# Altium PCB LabGener.PcbDoc
Units mm, origin at the board's own origin, x right, y up, seen from the top; angles counter-clockwise.
Board outline 94.69 x 76.75 mm, 2 copper layers (Top Layer, Bottom Layer); 60 components, 23 nets, 137 pads, 68 vias.
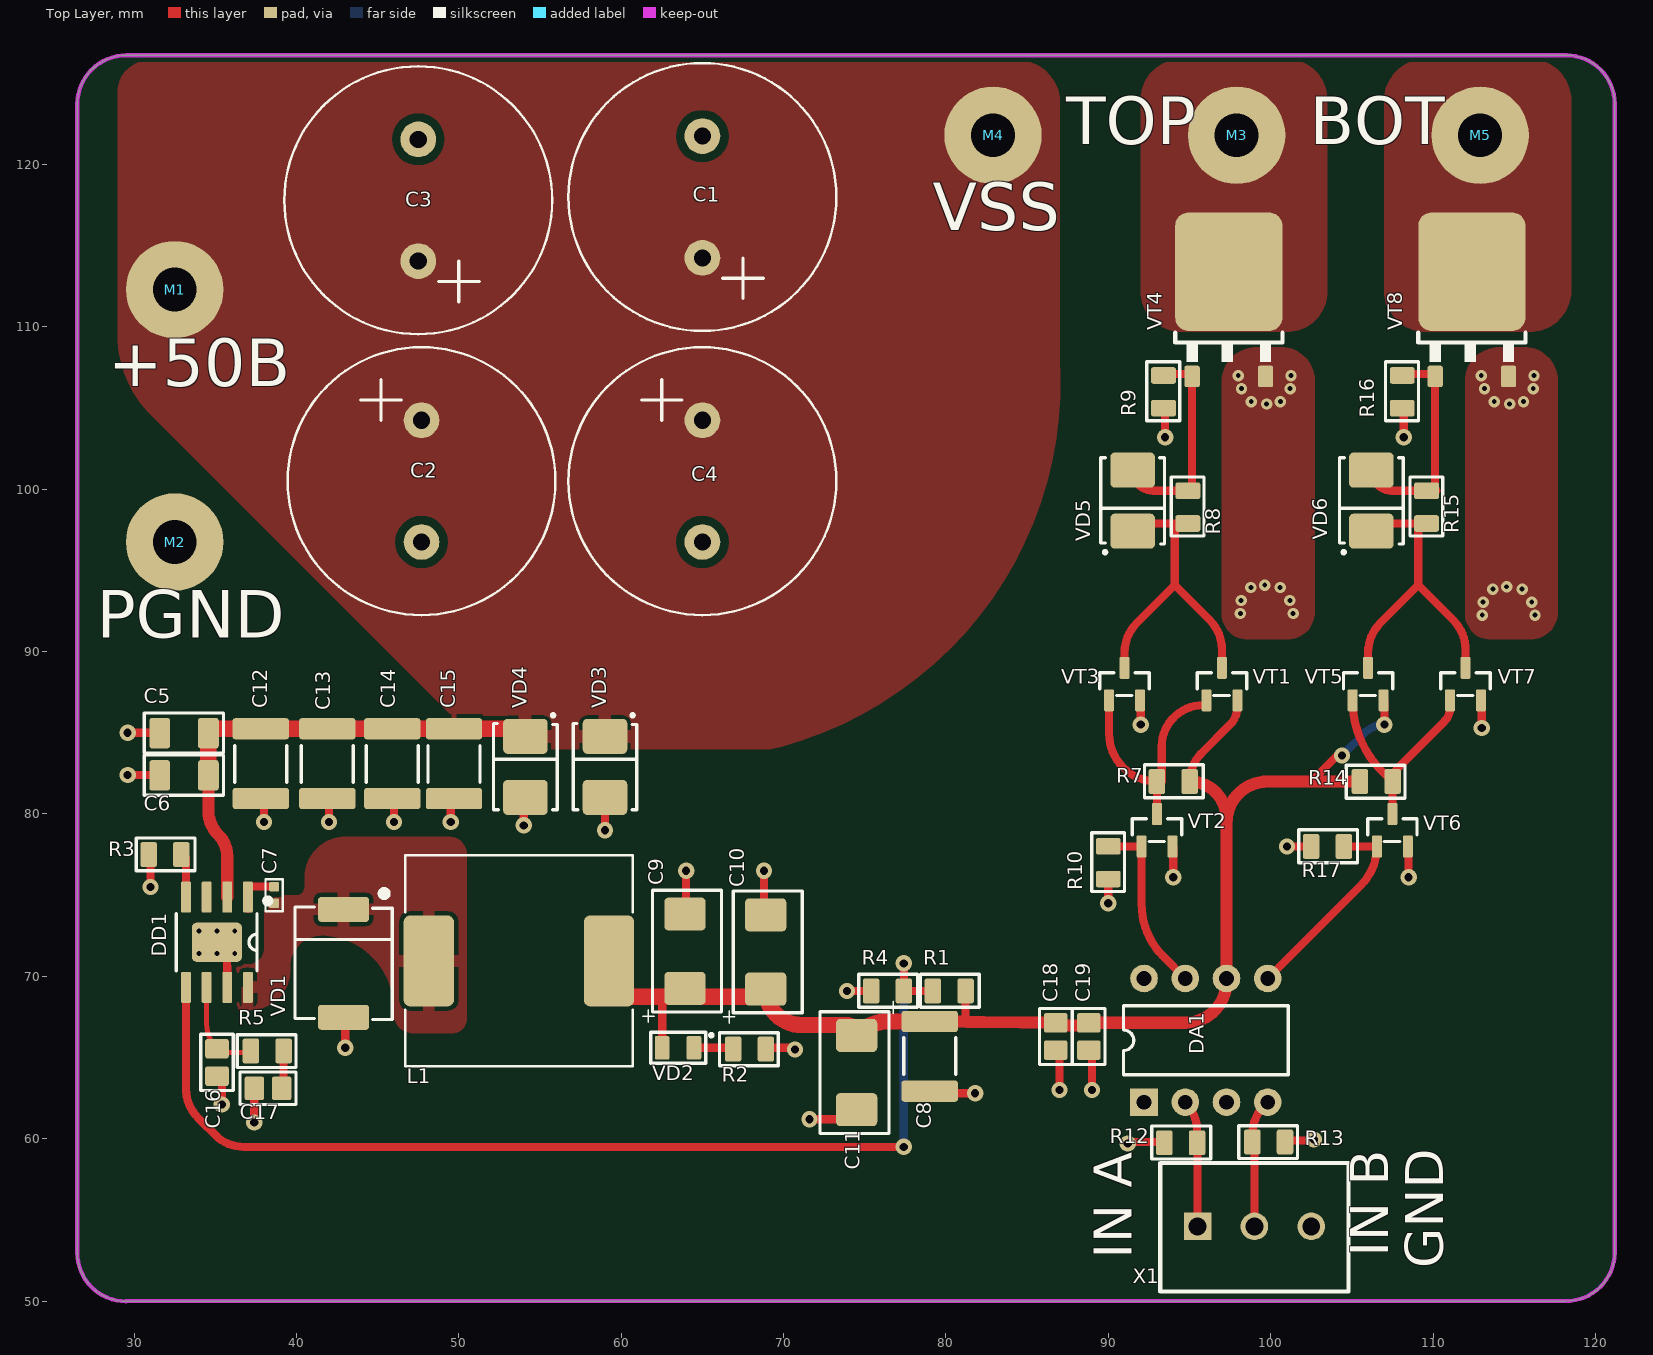
[diagram p0: Top Layer view]
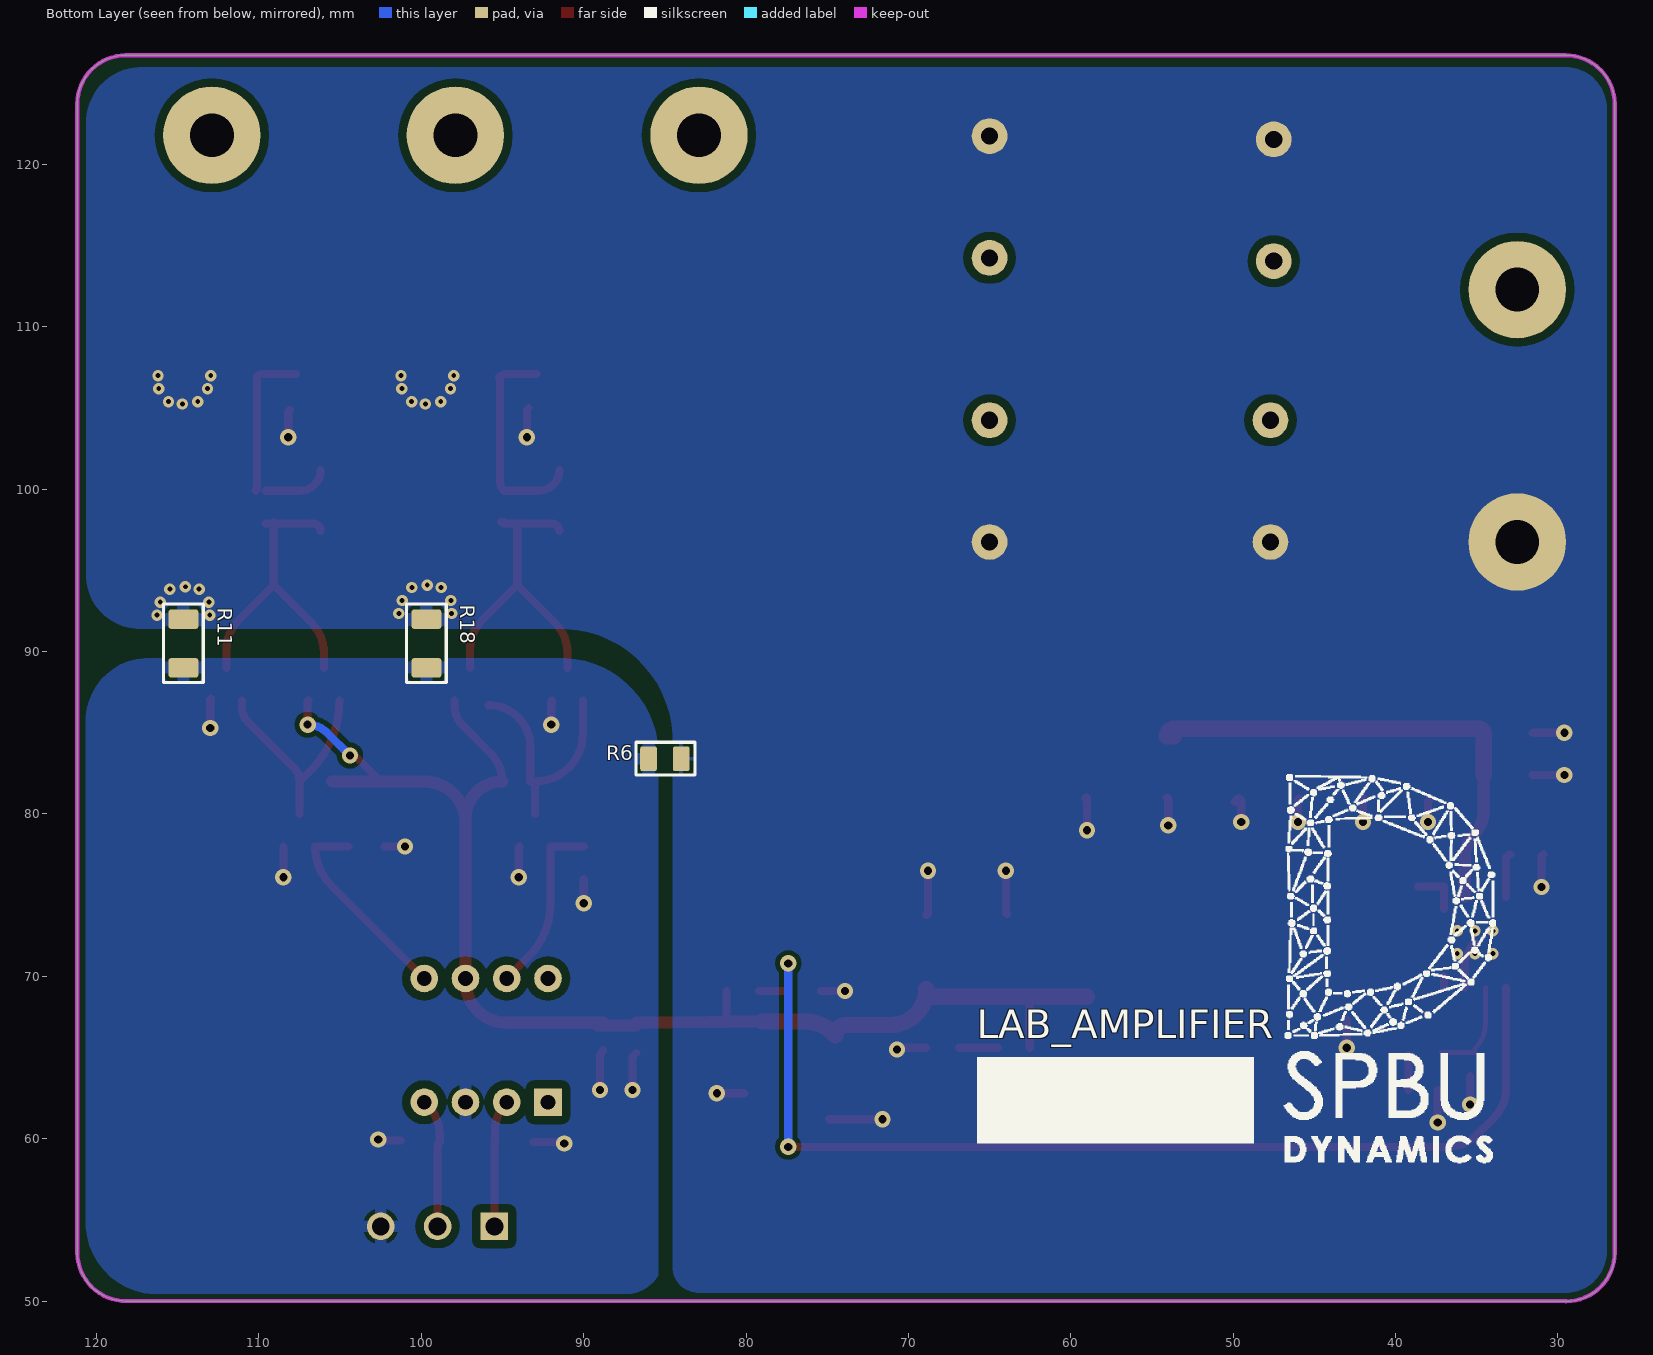
[diagram p1: Bottom Layer view, seen from below]
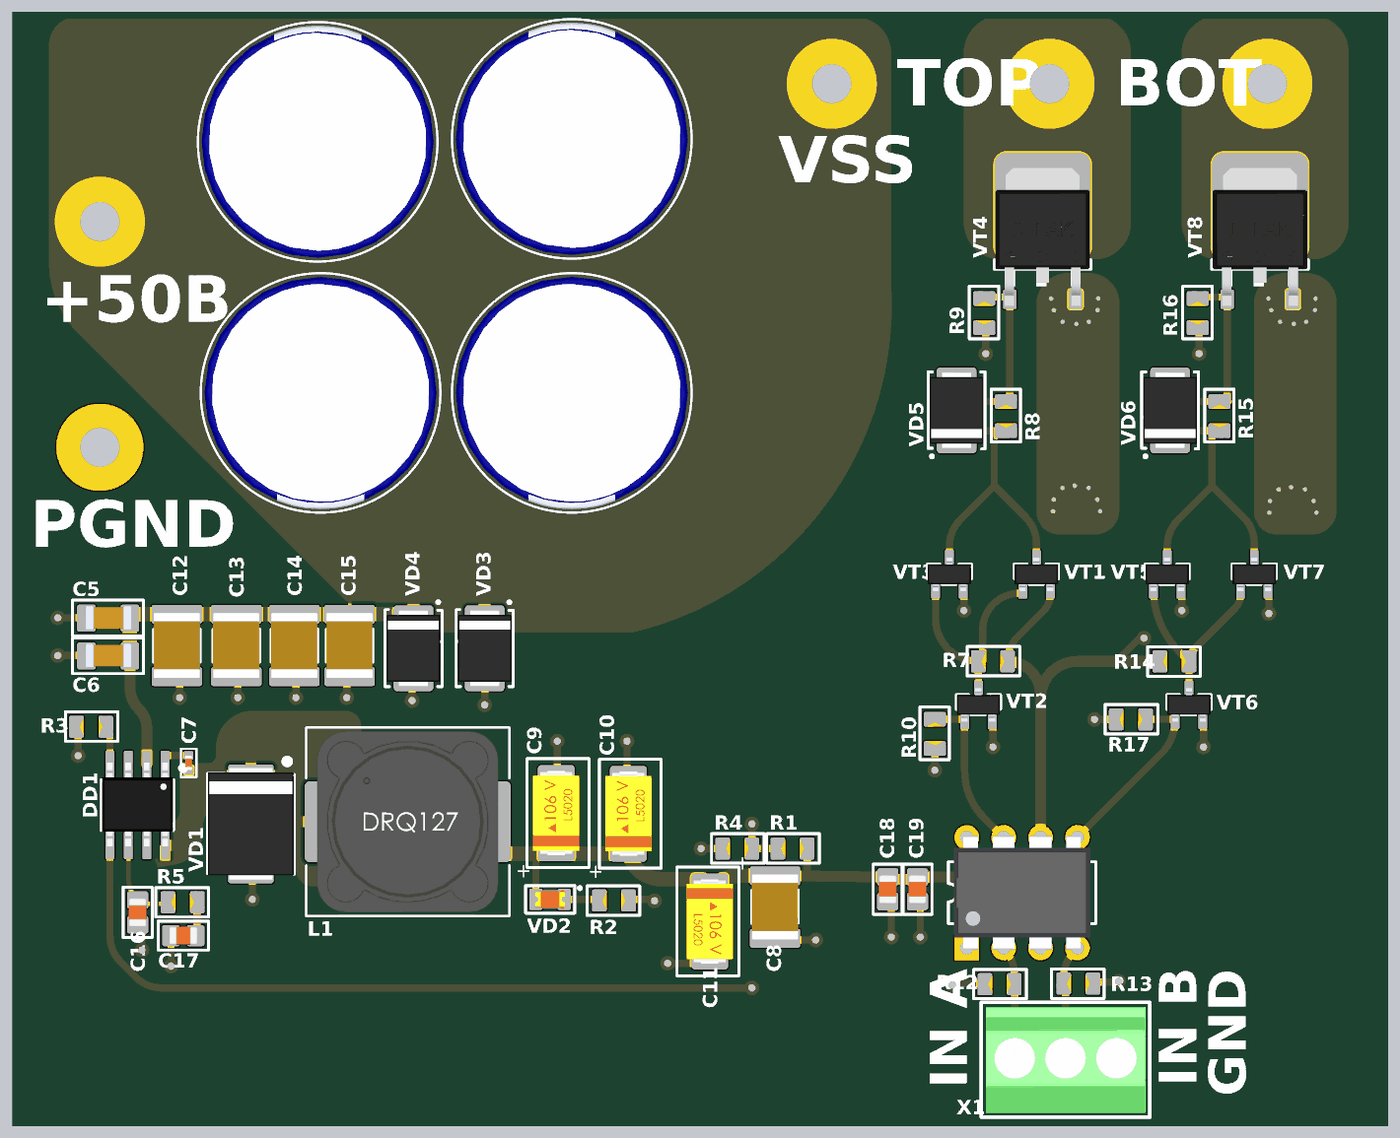
[diagram p2: 3D render of the assembled board from above, using the file's embedded part models]

## Layer stack, top to bottom
Top Solder: solder mask 0.0102, Solder Resist, Dk 3.5
Top Layer: signal copper 0.0356
Dielectric 1: dielectric 0.32, FR-4, Dk 4.8
Bottom Layer: signal copper 0.0356
Bottom Solder: solder mask 0.0102, Solder Resist, Dk 3.5

## Board outline
29.491,49.981 cw(c29.5,52.981) 26.5,52.991 26.5,52.981 26.5,123.727 cw(c29.509,123.718) 29.519,126.727 118.217,126.727 cw(c118.208,123.746) 121.189,123.737 121.189,123.746 121.189,52.991 cw(c118.189,53) 118.179,50

## Design rules (kind name [scope] priority, off if disabled: settings)
Clearance "+V - GND" [InNet('PGND') vs InNet('+50B')] p1: gap=0.5 ignorepadtopadclearanceinfootprint=FALSE
Clearance [All] p2: gap=0.3 ignorepadtopadclearanceinfootprint=FALSE except(0.5: Arc-THPad Track-THPad SMDPad-THPad THPad-THPad THPad-Via THPad-Fill THPad-Poly THPad-Region THPad-Text THPad-Hole)
Height [All] p1: minheight=0 maxheight=50 prefheight=12.7
HoleSize [All] p1: absolutevalues=TRUE maxlimit=3 minlimit=0.025 maxpercent=80.000 minpercent=20.000
MinimumSolderMaskSliver [All] p1: minsoldermaskwidth=0.05
PolygonConnect PolygonConnect_via [IsVia] p1: connectstyle=Direct reliefconductorwidth=0.75 reliefentries=4 polygonreliefangle="90 Angle" airgapwidth=0.254
PolygonConnect PolygonConnect_6 [HasFootprint('DPAK')] p2: connectstyle=Direct reliefconductorwidth=0.254 reliefentries=4 polygonreliefangle="90 Angle" airgapwidth=0.254
PolygonConnect PolygonConnect_7 [HasFootprint('R1206') vs InNet('PGND')] p3: connectstyle=Relief reliefconductorwidth=0.8 reliefentries=4 polygonreliefangle="90 Angle" airgapwidth=0.2
PolygonConnect PolygonConnect_8 [InNet('NetM3_1')] p4: connectstyle=Direct reliefconductorwidth=0.8 reliefentries=4 polygonreliefangle="90 Angle" airgapwidth=0.2
PolygonConnect PolygonConnect_11 [InNet('NetM5_1')] p5: connectstyle=Direct reliefconductorwidth=0.8 reliefentries=4 polygonreliefangle="90 Angle" airgapwidth=0.2
PolygonConnect PolygonConnect_10 [HasFootprint('K50-35(16X35)_V')] p6: connectstyle=Direct reliefconductorwidth=0.8 reliefentries=4 polygonreliefangle="90 Angle" airgapwidth=0.2
PolygonConnect PolygonConnect_9 [All vs InNet('PGND')] p7: connectstyle=Relief reliefconductorwidth=0.8 reliefentries=4 polygonreliefangle="90 Angle" airgapwidth=0.2
PolygonConnect PolygonConnect_5 [InNet('+50B') vs HasFootprint('SMB')] p8: connectstyle=Relief reliefconductorwidth=0.8 reliefentries=4 polygonreliefangle="90 Angle" airgapwidth=0.2
PolygonConnect PolygonConnect_4 [All vs IsNamedPolygon('+50B_L01_P020')] p9: thpad.connectstyle=Direct thpad.reliefconductorwidth=0.254 thpad.reliefentries=4 thpad.polygonreliefangle="90 Angle" thpad.airgapwidth=0.254 smdpad.connectstyle=Relief smdpad.reliefconductorwidth=0.254 smdpad.reliefentries=4 smdpad.polygonreliefangle="90 Angle" smdpad.airgapwidth=0.254 via.connectstyle=Relief via.reliefconductorwidth=0.254 via.reliefentries=4 via.polygonreliefangle="90 Angle" via.airgapwidth=0.254
PolygonConnect PolygonConnect_3 [All vs IsNamedPolygon('PGND_L02_P030')] p10: thpad.connectstyle=Direct thpad.reliefconductorwidth=0.254 thpad.reliefentries=4 thpad.polygonreliefangle="90 Angle" thpad.airgapwidth=0.254 smdpad.connectstyle=Relief smdpad.reliefconductorwidth=0.254 smdpad.reliefentries=4 smdpad.polygonreliefangle="90 Angle" smdpad.airgapwidth=0.254 via.connectstyle=Relief via.reliefconductorwidth=0.254 via.reliefentries=4 via.polygonreliefangle="90 Angle" via.airgapwidth=0.254
PolygonConnect PolygonConnect_2 [All vs IsNamedPolygon('NETM1_1_L01_P024') Or  IsNamedPolygon('NETM3_1_L01_P026')] p11: thpad.connectstyle=Direct thpad.reliefconductorwidth=0.254 thpad.reliefentries=4 thpad.polygonreliefangle="90 Angle" thpad.airgapwidth=0.254 smdpad.connectstyle=Direct smdpad.reliefconductorwidth=0.254 smdpad.reliefentries=4 smdpad.polygonreliefangle="90 Angle" smdpad.airgapwidth=0.254 via.connectstyle=Relief via.reliefconductorwidth=0.254 via.reliefentries=4 via.polygonreliefangle="90 Angle" via.airgapwidth=0.254
PolygonConnect PolygonConnect_1 [All vs IsNamedPolygon('NETM3_1_L01_P026')] p12: thpad.connectstyle=Direct thpad.reliefconductorwidth=0.254 thpad.reliefentries=4 thpad.polygonreliefangle="90 Angle" thpad.airgapwidth=0.254 smdpad.connectstyle=Direct smdpad.reliefconductorwidth=0.254 smdpad.reliefentries=4 smdpad.polygonreliefangle="90 Angle" smdpad.airgapwidth=0.254 via.connectstyle=Relief via.reliefconductorwidth=0.254 via.reliefentries=4 via.polygonreliefangle="90 Angle" via.airgapwidth=0.254
PolygonConnect [All] p13: connectstyle=Relief reliefconductorwidth=0.75 reliefentries=4 polygonreliefangle="90 Angle" airgapwidth=0.254
PolygonConnect PolygonConnect_ [All] p14: connectstyle=Direct reliefconductorwidth=0.75 reliefentries=4 polygonreliefangle="90 Angle" airgapwidth=0.254
RoutingVias [All] p1: holewidth=1 width=1 viastyle="Through Hole" minholewidth=0.3 minwidth=0.7 maxholewidth=1 maxwidth=3
SilkToSilkClearance [All] p1: silktosilkclearance=0
SilkToSolderMaskClearance [IsPad] p1: minsilkscreentomaskgap=0 clearancetoexposedcopper=TRUE
SolderMaskExpansion [All] p1: expansion=0.102
Width [All] p1: maxlimit=2 minlimit=0.1 preferedwidth=0.2 minimp=50.000000 maximp=50.000000 favimp=50.000000
25 further rules are at their usual default settings.

## Components (designator, comment, footprint, x,y, rotation, side; value= is the part's Value field where it differs from the comment)
C1 "Capacitor_pol" K50-35(16X35)_V 65,118 r180 top value=220мк
C2 "Capacitor_pol" K50-35(16X35)_V 47.7,100.5 r0 top value=220мк
C3 "Capacitor_pol" K50-35(16X35)_V 47.5,117.8 r180 top value=220мк
C4 "Capacitor_pol" K50-35(16X35)_V 65,100.5 r0 top value=220мк
C5 "0,1мк" C1206 33.1,85 r0 top
C6 "0,1мк" C1206 33.1,82.4 r0 top
C7 "0,1мк" C0402 38.6,75 r90 top
C8 "0,15мк" C1812 79,65.075 r270 top
C9 "Capacitor_pol" "TANTAL CASE C" 63.925,71.55 r90 top value=47мк
C10 "Capacitor_pol" "TANTAL CASE C" 68.9,71.5 r90 top value=47мк
C11 "Capacitor_pol" "TANTAL CASE C" 74.5,64.075 r270 top value=47мк
C12 "2,2мк" C1812 37.8,83.1 r90 top
C13 "2,2мк" C1812 41.9,83.1 r90 top
C14 "2,2мк" C1812 45.9,83.1 r90 top
C15 "2,2мк" C1812 49.7,83.1 r90 top
C16 "47" C0805 35.1,64.7 r90 top
C17 "4700" C0805 38.245,63.105 r0 top
C18 "1мк" C0805 86.76,66.295 r90 top
C19 "0,1мк" C0805 88.8,66.295 r90 top
DA1 "TC4424" DIP8 96,66 r90 top
DD1 "TPS54560" "SO Powerpad8" 35.1,72.1 r180 top
L1 "Inductor" IND_12.5x12.5 53.7,70.95 r0 top value=22мкГн
M1 "SCREW" SCREW2.5 32.5,112.3 r0 top
M2 "SCREW" SCREW2.5 32.5,96.75 r0 top
M3 "SCREW" SCREW2.5 97.9,121.8 r0 top
M4 "SCREW" SCREW2.5 82.9,121.8 r270 top
M5 "SCREW" SCREW2.5 112.9,121.8 r0 top
R1 "Resistor_0,125Вт" R0805 80.2,69.1 r0 top value=53,6к
R2 "Resistor_0,125Вт" R0805 67.9,65.524 r180 top value=510
R3 "Resistor_0,125Вт" R0805 31.9,77.5 r0 top value=243к
R4 "Resistor_0,125Вт" R0805 76.4,69.1 r0 top value=10,2к
R5 "Resistor_0,125Вт" R0805 38.2,65.405 r180 top value=16,9к
R6 "Resistor_0,125Вт" R0805 85,83.4 r180 bottom value=0
R7 "Resistor_0,125Вт" R0805 94,82 r0 top value=5,1
R8 "Resistor_0,125Вт" R0805 94.9,98.9 r90 top value=5,1
R9 "Resistor_0,125Вт" R0805 93.4,106 r90 top value=270
R10 "Resistor_0,125Вт" R0805 90,77 r90 top value=10к
R11 "Resistor_0,25Вт" R1206 114.653,90.5 r90 bottom value=1
R12 "Resistor_0,125Вт" R0805 94.457,59.75 r0 top value=10к
R13 "Resistor_0,125Вт" R0805 99.876,59.8 r180 top value=10к
R14 "Resistor_0,125Вт" R0805 106.5,82 r180 top value=5,1
R15 "Resistor_0,125Вт" R0805 109.6,98.9 r90 top value=5,1
R16 "Resistor_0,125Вт" R0805 108.1,106 r90 top value=270
R17 "Resistor_0,125Вт" R0805 103.5,78 r0 top value=10к
R18 "Resistor_0,25Вт" R1206 99.684,90.5 r90 bottom value=1
VD1 "DiodeSchottky" SMC 42.9,70.8 r270 top
VD2 "LED" L_0805 63.5,65.6 r180 top
VD3 "DiodeZener" SMB 59,82.9 r270 top
VD4 "DiodeZener" SMB 54.1,82.9 r270 top
VD5 "Diode" SMB 91.5,99.3 r90 top
VD6 "Diode" SMB 106.2,99.3 r90 top
VT1 "P-MOSFET" SOT23-3 97,88 r90 top
VT2 "N-MOSFET" SOT23-3 93,79 r90 top
VT3 "N-MOSFET" SOT23-3 91,88 r90 top
VT4 "N-MOSFET" DPAK 97.423,113.248 r0 top
VT5 "P-MOSFET" SOT23-3 106,88 r90 top
VT6 "N-MOSFET" SOT23-3 107.5,79 r90 top
VT7 "N-MOSFET" SOT23-3 112,88 r90 top
VT8 "N-MOSFET" DPAK 112.392,113.248 r0 top
X1 "Клеммник 3,5мм" TERMINAL-3WAY-3.5MM 99,54.6 r0 top

## Footprints (in the part's own frame and the unit in brackets; to place one, negate y for a bottom-side part, rotate by r counter-clockwise, add the part's x,y. Pads: shape width x height; smd on the part's side, far side on the other; paste and mask are expansions set on the pad)
C0402 [mm]
  rrect25% 0.59x0.6 smd: 1(-0.5,-0.02) 2(0.525,-0.02)
  silkscreen extent -0.98,-0.55 0.98,0.51, body extent -0.49,-0.25 0.51,0.25, height 0.48
C0805 [mm]
  rrect25% 1.21x1.46 smd paste-5: 1(-0.845,0) 2(0.845,0)
  silkscreen extent -1.73,-1 1.73,1, body extent -1,-0.62 1,0.63, height 0.78
C1206 [mm]
  rrect25% 1.28x1.87 smd: 1(-1.528,-0.024) 2(1.472,-0.024)
  silkscreen extent -2.48,-1.25 2.4,1.22, body extent -1.6,-0.85 1.6,0.85, height 1.75
C1812 [mm]
  rrect25% 1.3x3.47 smd: 1(-2.15,0) 2(2.15,0)
  silkscreen extent -1.15,-1.6 1.13,1.6, body extent -2.25,-1.6 2.25,1.6, height 1.3
DIP8 [mm]
  rect 1.7x1.7 hole 0.9: 1(-3.75,3.8)
  round 1.7 hole 0.9: 2(-3.75,1.26) 3(-3.75,-1.28) 4(-3.75,-3.82) 5(3.87,-3.82) 6(3.87,-1.28) 7(3.87,1.26) 8(3.87,3.8)
  silkscreen extent -2.06,-5.09 2.18,5.07, body extent -3.87,-4.71 4,4.69, height 4.36
DPAK [mil]
  rrect25% 37x52 smd: 1(-89,-248) 3(89,-248)
  rrect25% 260x288 smd: 2(0,6)
  silkscreen extent -130,-213 130,-142, body extent -193,-266 128,108, height 91
IND_12.5x12.5 [mm]
  rrect25% 3.1x5.6 smd: 1(-5.55,0) 2(5.55,0)
  silkscreen extent -7,-6.5 7,6.5, body extent -6.25,-6.25 6.25,6.25, height 8
K50-35(16X35)_V [mm]
  round 2.2 hole 1.05 mask+0.102: 1(0,3.75)
  round 2.2 hole 1.05: 2(0,-3.75)
  silkscreen extent -8.25,-8.25 8.25,8.25, body extent -8,-8.01 8,8, height 35.61
L_0805 [mm] "SMD LED LAMP"
  rrect25% 0.91x1.46 smd: 1(-0.975,0) 2(0.975,0)
  silkscreen extent -2.15,-0.95 1.67,0.95, body extent -1.01,-0.62 1.01,0.63, height 1.1
R0805 [mm] "Chip Resistor, 2-Leads, Body 2,10x1,30mm, IPC Medium Density"
  rrect25% 1.02x1.53 smd paste-5: 1(-1.007,0) 2(1.007,0)
  silkscreen extent -1.77,-1 1.85,1.02, body extent -1.1,-0.7 1.1,0.7, height 0.55
R1206 [mm]
  rrect25% 1.2x1.83 smd: 1(-1.5,0) 2(1.5,0)
  silkscreen extent -2.4,-1.23 2.42,1.23, body extent -1.6,-0.8 1.6,0.8, height 0.55
SCREW2.5 [mm]
  round 6 hole 2.7: 1(0,0)
SMB [mm]
  rrect25% 2.159x2.743 smd: 1(-1.88,0) 2(1.88,0)
  silkscreen extent -3.27,-1.96 2.64,1.96, body extent -2.65,-1.85 2.65,1.85, height 2.24
SMC [mm]
  rrect25% 1.54x3.14 smd: 1(-3.325,0) 2(3.325,0)
  silkscreen extent -4.5,-3 3.47,3, body extent -3.9,-2.95 3.9,2.95, height 2.44
"SO Powerpad8" [mm]
  rrect25% 0.61x1.91 smd: 1(-1.905,-2.78) 2(-0.635,-2.78) 3(0.635,-2.78) 4(1.905,-2.78) 5(1.905,2.78) 6(0.635,2.78) 7(-0.635,2.78) 8(-1.905,2.78)
  rrect25% 3.1x2.41 smd: 9(0,0)
  silkscreen extent -3.34,-2.76 2.5,1.75, body extent -2.45,-2.92 2.45,2.85, height 1.45
SOT23-3 [mm]
  rrect25% 1.35x0.61 smd: 1(-1,0.95) 2(1,0) 3(-1,-0.95)
  silkscreen extent -0.7,-1.52 0.7,1.52, body extent -1.15,-1.5 1.15,1.5, height 1.1
"TANTAL CASE C" [mil]
  rrect25% 80x100 smd: 1(-90,0) 2(90,0)
  silkscreen extent -172,-89 148,102, body extent -114,-63 114,63, height 102
TERMINAL-3WAY-3.5MM [mm]
  rect 1.7x1.7 hole 1.1: 1(-3.5,0)
  round 1.7 hole 1.1: 2(0,0) 3(3.5,0)
  silkscreen extent -5.8,-4 5.8,3.9, body extent -5.5,-3.7 5.5,3.6, height 8.5

## Part data
C1 C2 C3 C4: library part cap278, "Конденсатор полярный", Manufacture=Jamicon, Part Name=Electrolit, Part Number=TKR221M2CK35, Voltage=160B, ESR=95мОм, Iac max=0,5А, Iac rated=0,9А, id=cap278, Zmax=38мОм
C5 C6: library part cap179, "Конденсатор", Manufacture=Murata, Part Name=Ceramic, Part Number=GRM31CR72E104K, Voltage=250В, id=cap179, TKE=X7R
C7: library part cap277, "Конденсатор", Manufacture=Murata, Part Name=Ceramic, Part Number=GRM155R71H104KE14D, Voltage=50В, id=cap277, tga=0,10%, TKE=X7R
C8: library part cap285, "Конденсатор", Manufacture=TDK, Part Name=Ceramic, Part Number=C4532C0G1H154J250KA, Voltage=50В, id=cap285, TKE=NP0
C9 C10 C11: library part cap306, "Конденсатор полярный", Manufacture=Китай, Part Name=Tantal, Part Number=TECAP47/16VC10, Voltage=16В, id=cap306
C12 C13 C14 C15: library part cap293, "Конденсатор", Manufacture=TDK, Part Name=MLCC, Part Number=C4532X7R2A225M, Voltage=100В, id=cap293, tga=0,10%, TKE=X7R
C16: library part cap305, "Конденсатор", Manufacture=Murata, Part Name=MLCC, Part Number=GRM2165C1H470JD01D, Voltage=50В, id=cap305, tga=0,10%, TKE=NP0
C17: library part cap169, "Конденсатор", Manufacture=Murata, Part Name=Ceramic, Part Number=GRM216R71H472K, Voltage=50В, id=cap169, TKE=X7R
C18: library part cap151, "Конденсатор", Manufacture=Murata, Part Name=Ceramic, Part Number=GRM21BR71H105K, Voltage=50B, id=cap151, TKE=X7R
C19: library part cap160, "Конденсатор", Manufacture=Murata, Part Name=Ceramic, Part Number=GRM21BR71H104KA01L, Voltage=50В, id=cap160, TKE=X7R
DA1: library part driver29, "3A Dual High-Speed Power MOSFET Drivers", Manufacture=Microchip, Maximum output current=3A, Maximum Power Dissipation=730mW, Max Operating Supply Voltage=18B, Max Supply Current=2,5mA, Min Operating Supply Voltage=4,5B, Part Number=TC4424CPA, id=driver29, Logic High=2,4В, Logic Low=0,8B-1,6B, Part Name="3A Dual High-Speed Power MOSFET Drivers", “A” OUTPUT=Noninverting, “B” OUTPUT=Noninverting
DD1: library part pwr127, "5-A, Wide Input Range, Step-Down Converter", Current=5A, Frequency="100 kHz-25 MHz", Input Voltage=4,5-60В, Manufacturer="Texas Instruments", Output Voltage=0,8B-58,8B, Part Name="Step Down DC-DC Converter with Eco-mode", Part Number=TPS54560BQDDAQ1, id=pwr127, Type=Impulse
L1: library part ind79, "EMI Suppression Filter", Manufacture=Epcos, Part Name="SMD Power Inductors", Part Number=B82477G4223M000, Rated Current=3,6A, Resistance=0,038Ohm, Saturation Current=4,25A, id=ind79
M1 M2 M3 M4 M5: library part connect88, Part Name="Винт М2.5 с заземлением", id=connect88
R1: library part res1234, "Резистор", Manufacture=Yageo, Part Name=Resistor, Part Number=RC0805FR-0753K6L, Power=0,125Вт, Accuracy=0,01, id=res1234
R2: library part res68, "Резистор", Manufacture=Yageo, Part Name=Resistor, Part Number=RC0805FR-07510RL, Power=0,125Вт, Accuracy=0,01, id=res68
R3: library part res1189, "Резистор", Manufacture=Yageo, Part Name=Resistor, Part Number=RC0805FR-07243KL, Power=0,125Вт, Accuracy=0,01, id=res1189
R4: library part res1230, "Резистор", Manufacture=Yageo, Part Name=Resistor, Part Number=RC0805FR-0710K2L, Power=0,125Вт, Accuracy=0,01, id=res1230
R5: library part res1186, "Резистор", Manufacture=Yageo, Part Name=Resistor, Part Number=RC0805FR-0716K9L, Power=0,125Вт, Accuracy=0,01, id=res1186
R6: library part res0, "Резистор", Manufacture=Yageo, Part Name=Resistor, Part Number=RC0805FR-070RL, Power=0,125Вт, Accuracy=0,01, id=res0
R7 R8 R14 R15: library part res18, "Резистор", Manufacture=Yageo, Part Name=Resistor, Part Number=RC0805FR-075R1L, Power=0,125Вт, Accuracy=0,01, id=res18
R9 R16: library part res60, "Резистор", Manufacture=Yageo, Part Name=Resistor, Part Number=RC0805FR-07270RL, Power=0,125Вт, Accuracy=0,01, id=res60
R10 R12 R13 R17: library part res101, "Резистор", Manufacture=Yageo, Part Name=Resistor, Part Number=RC0805FR-0710KL, Power=0,125Вт, Accuracy=0,01, id=res101
R11 R18: library part res584, "Резистор", Manufacture=Yageo, Part Name=Resistor, Part Number=RC1206FR-071RL, Power=0,25Вт, Accuracy=0,01, id=res584
VD1: library part diode32, "Диод Шоттки", Breakdown Voltage=60B, Capacitance=300pF, Forward Current=5A, Forward Voltage=0,7B, Leakage current=20mA, Manufacture="Diodes Incorporated", Part Name="SCHOTTKY BARRIER RECTIFIER", Part Number=B560C, Temp MAX=+150, Temp MIN=-55, id=diode32, Max Reverse Voltage=60B, Number of Channels=1
VD2: library part diode5, "Светодиод", Part Number=KP-2012EC, id=diode5, Part Name=LED
VD3 VD4: library part TPSMB56A, "Cтабилитрон (лавинный выпрямительный диод) односторонний", Breakdown Voltage=58,8B, Clamping voltage=77B, Leakage current=8uA, Manufacture=Littelfuse, Part Name="TVS diode Unidirectional", Peak Pulse Power=600W, Stand-off Voltage=56B, id=tvs285, Number of diodes=1, Part Number=TPSMB56A
VD5 VD6: library part diode33, "Диод", Breakdown Voltage=400B, Forward Current=1A, Forward Voltage=1,25B, Manufacture="ON Semiconductor", Part Name="Ultrafast Power Rectifiers", Part Number=MURS140T3G, id=diode33, Max Reverse Voltage=400B, Reverse Recovery time=50ns
VT1 VT5: library part mosfert27, "N-MOSFET", Continuous drain current=(-4)A, Gate-to-source voltage=(+-)12B, Manufacturer=Alpha&Omega, Part Number=AO3401A, Power dissipation=1,4W, Pulsed drain current=(-27)A, id=mosfert27, Rds=0,06Ohm, Structure=p-channel, Total gate charge=14nC, V drain-source max=(-30B)
VT2 VT3 VT6 VT7: library part mosfert26, Continuous drain current=5,7A, Gate-to-source voltage=(+-)12B, Manufacturer=Alpha&Omega, Part Number=AO3400A, Power dissipation=1,4W, Pulsed drain current=30A, id=mosfert26, Rds=0,032Ohm, Structure=n-channel, Total gate charge=7nC, V drain-source max=30B
VT4 VT8: library part mosfert20, Continuous drain current=33A, Gate-to-source voltage=(+-)20B, Manufacturer="International Rectifier", Part Number=IRFR4615PbF, Power dissipation=144W, Pulsed drain current=140A, id=mosfert20, Rds=0,042Ohm, Structure=n-channel, Total gate charge=26nC, V drain-source max=150B
X1: library part connect35, "Разъем - 3 конт. клеммник", Part Name="TERMINAL BLOCK 3 way", Contact_1="IN A", Contact_2="IN B", Contact_3=GND, Etch=3.5mm, id=connect35

## Via types
v1: diameter 1, hole 0.5, Top Layer to Bottom Layer, tented both sides, 34 vias
v2: diameter 0.7, hole 0.3, Top Layer to Bottom Layer, tented both sides, 34 vias

## Nets (pads, with @x,y where several pads share a name; then routed paths per layer and width w, separated by ;. In a path a pad name is that pad's centre, name@x,y a point inside that pad or via, vN(x,y) a via of type N, cw(c..) or ccw(c..) an arc to the next point about the centre after c; other vN are vias at no path point)
+5B: C8.1 C9.1 C10.1 C11.1 C18.2 C19.2 DA1.6 L1.2 R1.2 R7.2 R14.2 VD2.2 VT1.3 VT5.3 | length 84.2
  Top Layer w0.5: 62.5,68.75 cw(c62.5,68.725) 62.525,68.725 VD2.2 ; R1.2 81.207,67.43 ccw(c81.524,67.43) 81.3,67.206 ; R7.2@95.015,82.007 cw(c97.447,82.007) 95.727,83.727 97.5,85.5 ccw(c96.414,86.586) 97.95,86.586 VT1.3 ; 102.5,82 104.1,83.6 v1(104.4,83.6) ; VT5.3 cw(c106.95,86.958) 106.993,86.958 107,86.958 v1(107,85.5)
  Top Layer w0.75: C8.1@79,67.234 81.3,67.206 82.295,67.194 C18.2 ; C18.2@86.76,66.98 C19.2@89.14,66.98 ; C19.2 94.74,67.14 ccw(c94.74,69.68) 97.28,69.68 DA1.6 97.28,79.46 ; R7.2@95.015,82.007 cw(c95,79.728) 97.28,79.728 97.28,79.46 ; R14.2 102.5,82 99.82,82 ccw(c99.82,79.46) 97.28,79.46
  Top Layer w1: L1.2@59,68.75 62.5,68.75 68.9,68.75 C10.1 ccw(c71.114,69.214) 71.114,67 73.861,67 cw(c73.861,66.361) C11.1 74.62,66.481 cw(c76.416,64.685) 76.416,67.225 C8.1
  Bottom Layer w0.5: v1(104.4,83.6) 105.805,85.005 cw(c107,83.81) v1(107,85.5)
+50B: C1.1 C2.1 C3.1 C4.1 C5.2 C6.2 C12.2 C13.2 C14.2 C15.2 DD1.2 M1.1 M4.1 VD3.1 VD4.1 | length 30.8
  Top Layer w0.75: C6.2 34.572,80.216 ccw(c36.716,80.216) 35.2,78.7 cw(c33.908,77.408) 35.735,77.408 DD1.2
  Top Layer w1: C6.2 C5.2 cw(c34.846,84.976) 34.846,85.25 C12.2 C13.2 C14.2 C15.2 53.63,85.25 cw(c53.63,84.78) VD4.1 VD4.1@53.64,84.78
DGND: C18.1 C19.1 DA1.3 R6.1 R10.1 R11.1 R12.1 R13.1 R17.1 R18.1 VT2.3 VT3.3 VT6.3 VT7.3 X1.3 | length 18
  Top Layer w0.5: C18.1@86.76,65.29 87,65.05 v1(87,63) ; C19.1 cw(c88.317,64.967) 89,64.967 v1(89,63) ; v1(90,74.5) R10.1 ; v1@91.434,59.8 R12.1@93.1,59.8 ; VT3.3 cw(c91.829,86.879) 92,86.879 v1(92,85.5) ; VT2.3 cw(c93.829,77.879) 94,77.879 v1(94,76.1) v1@94,76 ; v1(101,78) R17.1@102.268,78 ; R13.1@101.25,59.9 v1@102.7,59.9 ; v1(108.5,76.1) VT6.3@108.5,77.979 ; VT7.3@112.95,87.1 113,87.05 v1(113,85.3)
  other v1: 91.2,59.7 102.65,59.95
NetC7_1: C7.1 DD1.8 L1.1 VD1.1 | length 0.7
  Top Layer w0.5: DD1.8 DD1.8@37.005,70.005
NetC7_2: C7.2 DD1.1 | length 3
  Top Layer w0.5: DD1.1@37.005,74.14 DD1.1 37.005,75.525 C7.2
NetC16_2: C16.2 DD1.6 R5.2 | length 6
  Top Layer w0.3: DD1.6 34.465,67.078 ccw(c36.633,67.078) C16.2 ; C16.2@35.1,65.3 35.105,65.305 R5.2@37.193,65.305
NetC17_2: C17.2 R5.1 | length 2.1
  Top Layer w0.5: C17.2@39.19,63.005 R5.1@39.19,65.15
NetDA1_2: DA1.2 R12.2 X1.1 | length 7.9
  Top Layer w0.5: DA1.2@94.715,62.19 cw(c94.8,62.19) DA1.2 cw(c92.99,60.5) 95.465,60.5 R12.2 cw(c95.38,59.665) 95.5,59.665 X1.1
NetDA1_4: DA1.4 R13.2 X1.2 | length 8
  Top Layer w0.5: X1.2 99,59.484 ccw(c98.553,59.484) R13.2 98.869,60.247 cw(c101.409,60.247) 99.613,62.043 DA1.4
NetDA1_5: DA1.5 R17.2 VT6.1 | length 13
  Top Layer w0.5: DA1.5@100.018,69.87 DA1.5 105.56,75.61 ccw(c103.17,78) VT6.1 ; R17.2@104.5,78.007 VT6.1@106.55,78.007
NetDA1_7: DA1.7 R10.2 VT2.1 | length 11.1
  Top Layer w0.5: R10.2 92.05,78.007 VT2.1 92.05,74.455 ccw(c96.625,74.455) 93.39,71.22 DA1.7
NetDD1_4: DD1.4 R3.2 | length 2.8
  Top Layer w0.5: R3.2 cw(c32.908,77.213) 33.195,77.213 DD1.4
NetDD1_5: DD1.5 R1.1 R4.2 | length 67.1
  Top Layer w0.5: DD1.5 33.195,63.077 ccw(c35.735,63.077) 33.939,61.281 35.154,60.066 ccw(c36.752,62.04) 36.752,59.5 v1(77.4,59.5) ; v1(77.4,70.8) 77.408,70.793 R4.2 R1.1
  Bottom Layer w0.5: v1(77.4,59.5) v1(77.4,70.8)
NetM3_1: M3.1 VT4.2
NetM5_1: M5.1 VT8.2
NetR2_2: R2.2 VD2.1 | length 2.4
  Top Layer w0.5: VD2.1 R2.2@66.893,65.6
NetR7_1: R7.1 VT1.1 VT2.2 VT3.1 | length 18.9
  Top Layer w0.5: VT3.1 90.05,84.95 ccw(c93,84.95) 93,82 VT2.2 ; R7.1@93.292,82 93.292,84.16 ; VT1.1@95.867,86.7 VT1.1@95.832,86.7 ; 93.293,84.16 cw(c95.833,84.16) VT1.1@95.832,86.7 ; 93.293,84.16 cw(c95.833,84.16) VT1.1@95.832,86.7
NetR8_1: R8.1 VD5.1 VT1.2 VT3.2 | length 20.1
  Top Layer w0.5: VT3.2 91,89.948 cw(c93.54,89.948) 91.744,91.744 94.092,94.092 ; VD5.1 cw(c91.973,97.42) 91.973,97.893 94.092,97.893 ; R8.1 94.092,97.893 ; R8.1@94.9,97.992 R8.1@95.075,97.992 ; VT1.2 97,90.133 ccw(c94.46,90.133) 96.256,91.929 94.092,94.092 ; 94.092,94.092 94.092,97.893
NetR8_2: R8.2 R9.2 VD5.2 VT4.1 | length 13.7
  Top Layer w0.5: VD5.2 ccw(c92.772,101.18) 92.772,99.908 R8.2 ccw(c94.265,100.542) 95.163,100.542 VT4.1@95.163,106.942 ; R9.2@92.908,107.1 94.711,107.1 cw(c94.711,106.375) VT4.1@95.163,106.942 ; VT4.1@95.163,106.942 cw(c94.711,106.375) 95.223,106.888 ccw(c95.163,106.888) VT4.1 VT4.1@95.163,106.942
NetR14_1: R14.1 VT5.1 VT6.2 VT7.1 | length 14.5
  Top Layer w0.5: VT5.1 ccw(c111.224,87) 106.858,82.634 107.5,81.993 VT6.2 ; R14.1@107.507,82.405 R14.1 cw(c108.733,82) 107.866,82.866 110.7,85.7 ccw(c109.855,86.545) 111.05,86.545 VT7.1
NetR15_1: R15.1 VD6.1 VT5.2 VT7.2 | length 20
  Top Layer w0.5: VT5.2 106,89.948 cw(c108.54,89.948) 106.744,91.744 109.092,94.092 ; VD6.1 cw(c106.672,97.42) 106.672,97.893 R15.1@109.092,97.893 ; R15.1@109.092,97.993 R15.1@109.092,97.893 ; R15.1 R15.1@109.092,97.893 ; VT7.2 112,90.133 ccw(c109.46,90.133) 111.256,91.929 109.092,94.092 ; 109.092,94.092 R15.1@109.092,97.893
NetR15_2: R15.2 R16.2 VD6.2 VT8.1 | length 13.7
  Top Layer w0.5: VD6.2 ccw(c107.473,101.18) 107.473,99.907 R15.2 ; R16.2@107.708,107.1 109.766,107.1 cw(c109.766,106.582) VT8.1 110.132,100.072 ccw(c110.364,100.072) R15.2@110.2,99.907
PGND: C1.2 C2.2 C3.2 C4.2 C5.1 C6.1 C8.2 C9.2 C10.2 C11.2 C12.1 C13.1 C14.1 C15.1 C16.1 C17.1 DD1.7 DD1.9 M2.1 R2.1 R3.1 R4.1 R6.2 R9.1 R11.2 R16.1 R18.2 VD1.2 VD3.2 VD4.2 VT4.3 VT8.3 | length 42.2
  Top Layer w0.5: v1(29.6,82.4) 31.514,82.4 cw(c31.514,82.318) C6.1 ; v1(29.6,85) 31.514,85 cw(c31.514,84.918) C5.1 ; R3.1 30.9,77.5 31,77.4 v1(31,75.5) ; DD1.9 cw(c33.567,70.567) 35.735,70.567 DD1.7 ; v1(35.4,62.1) C16.1@35.4,63.845 ; v1@37.4,60.9 v1(37.4,61) C17.1@37.4,63.005 ; C12.1@37.9,80.85 cw(c37.9,80.75) 38,80.75 v1(38,79.5) ; C13.1 cw(c41.9,80.85) 42,80.85 v1(42,79.5) ; v1(43,65.6) VD1.2@43,67.334 ; C14.1 cw(c45.9,80.85) 46,80.85 v1(46,79.5) ; v1(49.5,79.5) 49.5,80.75 cw(c49.7,80.75) C15.1 C15.1@49.9,80.75 ; v1(54,79.3) 54,80.92 cw(c54.1,80.92) VD4.2 ; v1(59,79) VD3.2 cw(c59,80.92) VD3.2@59.1,80.92 ; C9.2 ccw(c63.744,74.017) 64,74.017 v1(64,76.5) ; v1(68.8,76.5) 68.8,73.886 ccw(c68.9,73.886) C10.2 ; R2.1@68.907,65.6 70.6,65.6 cw(c70.6,65.5) v1(70.7,65.5) ; v1(71.6,61.2) C11.2@74.9,61.2 ; v1(73.9,69.1) R4.1 ; C8.2@80.11,62.8 v1(81.8,62.8) ; R9.1 cw(c93.159,104.751) 93.5,104.751 v1(93.5,103.2) v1@93.5,103.1 ; R16.1@108.1,104.892 cw(c107.859,104.651) 108.2,104.651 v1(108.2,103.2)
  other v2: 34,71.4 35.1,71.4 36.2,71.4 34,72.8 35.1,72.8 36.2,72.8 113.034,92.248 116.284,92.248 98.134,92.348 101.384,92.348 113.084,93.048 116.084,93.048 98.184,93.148 101.184,93.148 113.684,93.848 115.484,93.848 98.784,93.948 100.584,93.948 114.534,93.998 99.634,94.098 99.75,105.25 114.719,105.25 98.8,105.4 100.6,105.4 113.769,105.4 115.569,105.4 98.2,106.2 101.2,106.2 113.169,106.2 116.169,106.2 98,107 101.25,107 112.969,107 116.219,107
pads on no net: DA1.1 DA1.8 DD1.3

## Polygon pours and split planes (outlines as drawn)
NetM5_1 on Top Layer "NETM5_1_L01_P026" (solid, pour order 26): 109.54,109.7 cw(c109.54,112.24) 107,112.24 107,123.96 cw(c109.54,123.96) 109.54,126.5 115.96,126.5 cw(c115.96,123.96) 118.5,123.96 118.5,112.24 cw(c115.96,112.24) 115.96,109.7
NetM3_1 on Top Layer "NETM3_1_L01_P024" (solid, pour order 24): 94.54,109.7 cw(c94.54,112.24) 92,112.24 92,123.96 cw(c94.54,123.96) 94.54,126.5 100.96,126.5 cw(c100.96,123.96) 103.5,123.96 103.5,112.2 cw(c101,112.2) 101,109.7
NetC7_1 on Top Layer "NETC7_1_L01_P022" (solid, pour order 22): 36.5,67.8 37.7,68 ccw(c37.21,70.352) 39.6,70.6 cw(c41.5,70.6) 41.5,72.5 cw(c41.5,68) 45.993,67.752 ccw(c47.179,67.687) 47.179,66.5 49.6,66.5 ccw(c49.6,67.4) 50.5,67.4 50.5,77.5 ccw(c49.4,77.5) 49.4,78.6 43.04,78.6 ccw(c43.04,76.06) 40.5,76.06 40.5,75.5 cw(c40,75.5) 40,75 38.6,75 ccw(c38.6,74.4) 38,74.4 38,71.6 cw(c37.023,71.722) 36.9,70.745 36.609,70.745 ccw(c36.596,70.445) 36.3,70.5 36.3,68.3
PGND on Top Layer "PGND_L01_P048" (solid, pour order 48): 111.969,92.3 111.969,106.627 cw(c114.092,106.627) 114.092,108.75 115.619,108.75 cw(c115.619,106.7) 117.669,106.7 117.669,92.4 cw(c116.019,92.4) 116.019,90.75 113.519,90.75 cw(c113.519,92.3)
PGND on Top Layer "PGND_L01_P044" (solid, pour order 44): 97,92.3 97,106.627 cw(c99.123,106.627) 99.123,108.75 100.65,108.75 cw(c100.65,106.7) 102.7,106.7 102.7,92.4 cw(c101.05,92.4) 101.05,90.75 98.55,90.75 cw(c98.55,92.3)
+50B on Top Layer "+50B_L01_P020" (solid, pour order 20): 51.6,84 44.6,91 31.019,104.581 cw(c35.894,109.456) 29,109.456 29,124.5 cw(c30.9,124.5) 30.9,126.4 84.46,126.4 cw(c84.46,123.86) 87,123.86 87,107.773 cw(c63.834,106.563) 69.222,84
DGND on Bottom Layer "DGND_L02_P028" (solid, pour order 28): 91.4,89.6 116.788,89.6 cw(c116.788,85.722) 120.666,85.722 120.666,54.873 cw(c116.193,54.873) 116.193,50.4 87.54,50.4 cw(c87.54,52.94) 85.4,51.572 85.4,83.6 cw(c91.4,83.6)
PGND on Bottom Layer "PGND_L02_P030" (solid, pour order 30): 84.5,84.5 84.5,52.1 cw(c82.9,52.1) 82.9,50.5 29.54,50.5 cw(c29.54,53.04) 27,53.04 27,123.46 cw(c29.54,123.46) 29.54,126 117.243,126 cw(c117.243,122.617) 120.626,122.617 120.626,94.691 cw(c117.335,94.691) 117.335,91.4 91.4,91.4 ccw(c91.4,84.5)

## Keep-outs
Keep-Out Layer:
  lines w0.254: 26.5,52.981 26.5,123.727 cw(c29.509,123.718) 29.519,126.727 118.217,126.727 cw(c118.208,123.746) 121.189,123.737 ; 26.5,52.991 ccw(c29.5,52.981) 29.491,49.981 ; 29.5,50 118.179,50 ccw(c118.189,53) 121.189,52.991 121.189,123.746

## Silkscreen, mask and mechanical layers (free items; w line width, h text height)
Top Overlay:
  text "TOP" at 87.4,120.3 h5
  text "BOT" at 102.4,120.3 h5
  text "VSS" at 79.2,115 h5
  text "+50B" at 28.4,105.4 h5
  text "PGND" at 27.7,89.9 h5
  text "IN B" at 108,52.733 h4 r90
  text "IN A" at 92.2,52.6 h4 r90
  text "GND" at 111.4,52.033 h4 r90
Bottom Overlay:
  drawing of 3679 lines, arcs and shapes, not listed
  text "LAB_AMPLIFIER" at 65.8,65.6 h3